# Altium PCB PCB2.PcbDoc
Units mil, origin at the board's own origin, x right, y up, seen from the top; angles counter-clockwise.
Board outline 1605 x 1705 mil, 2 copper layers (Top Layer, Bottom Layer); 5 components, 53 nets, 56 pads, 10 vias.
Unrouted connection lines stored in the file: 2.
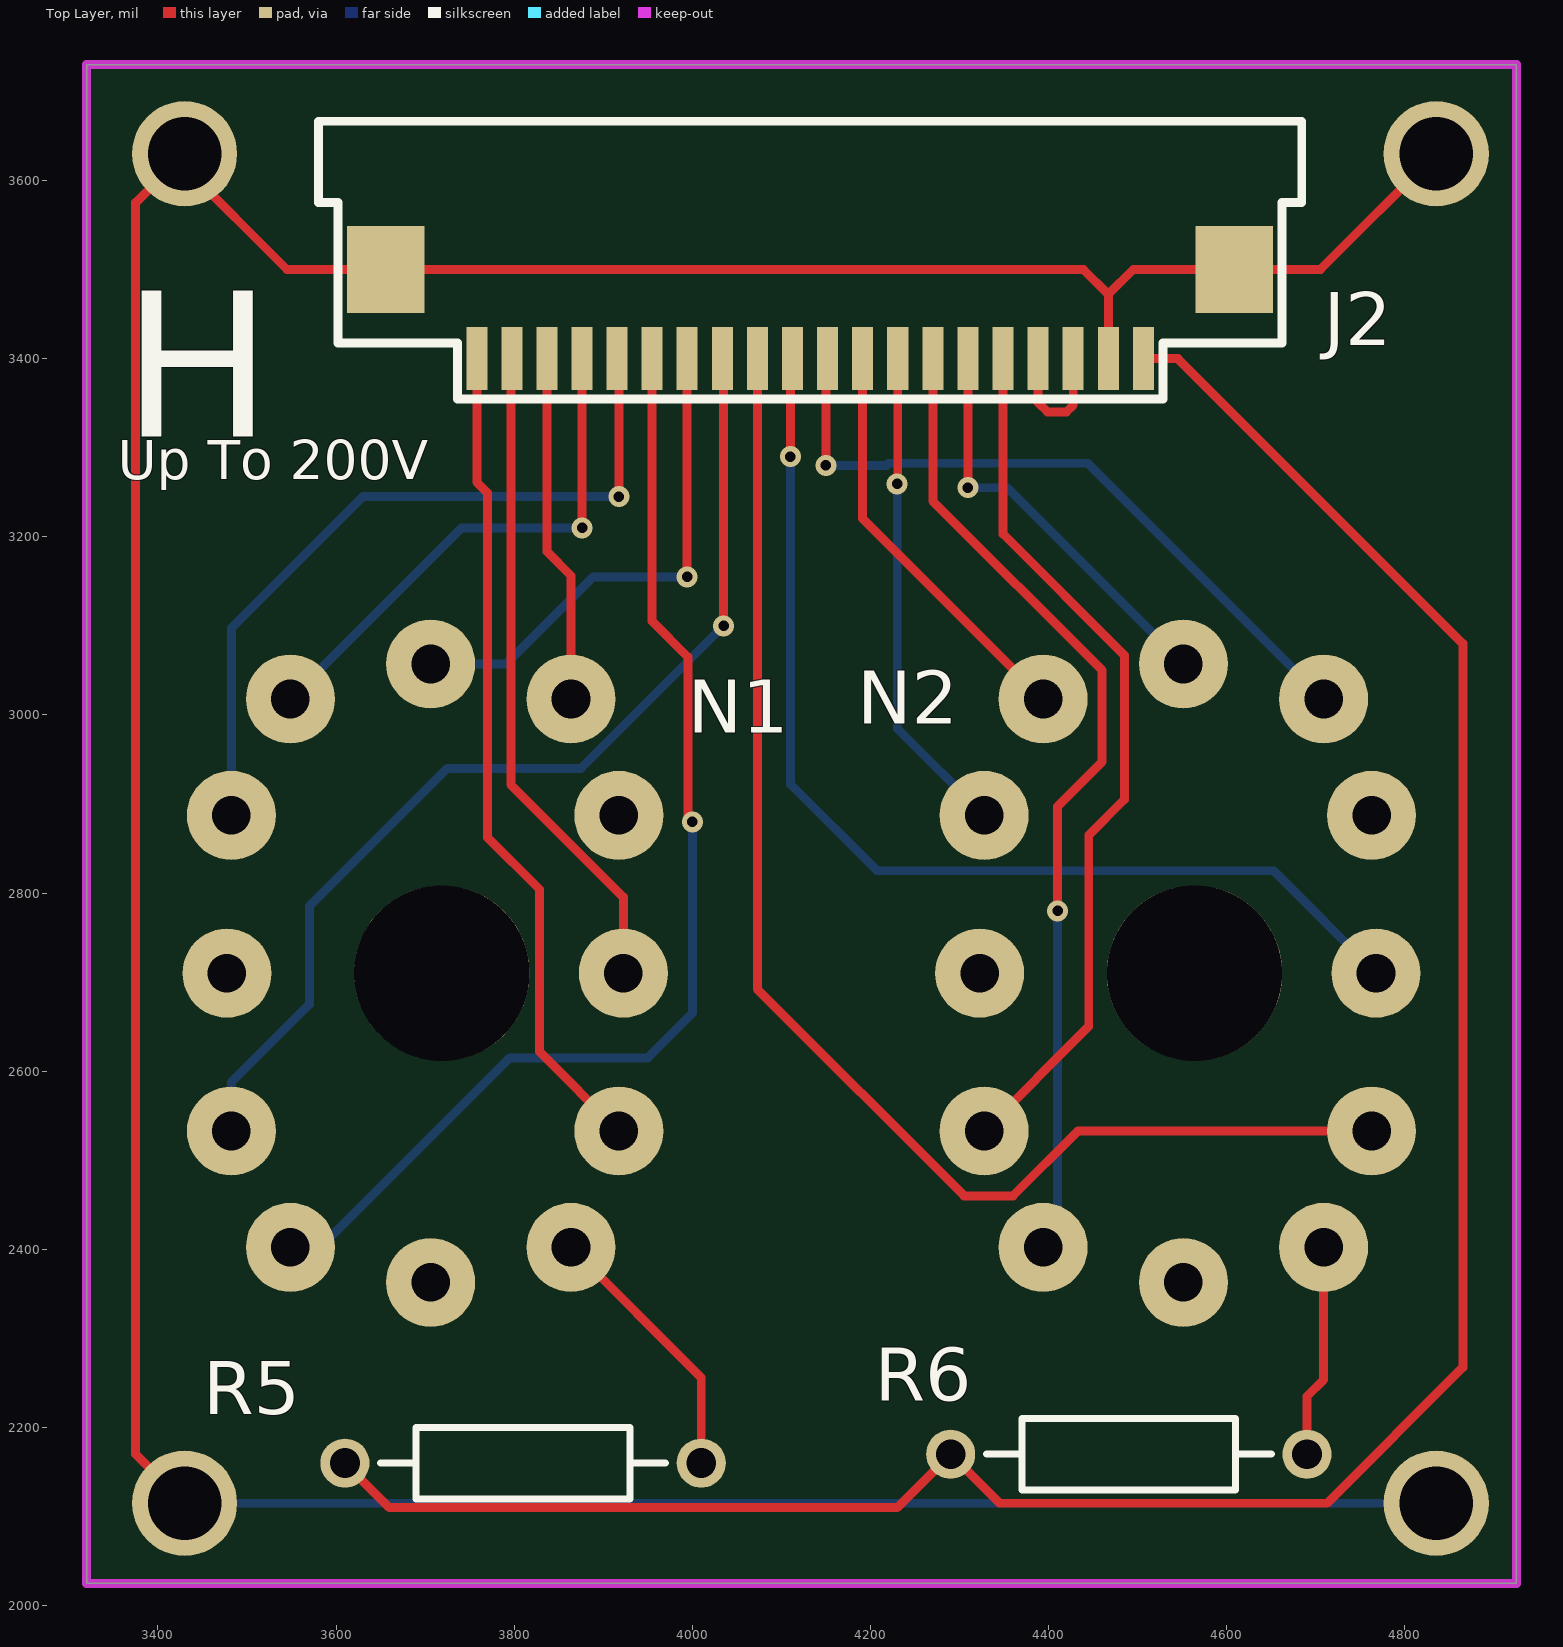
[diagram p0: Top Layer view]
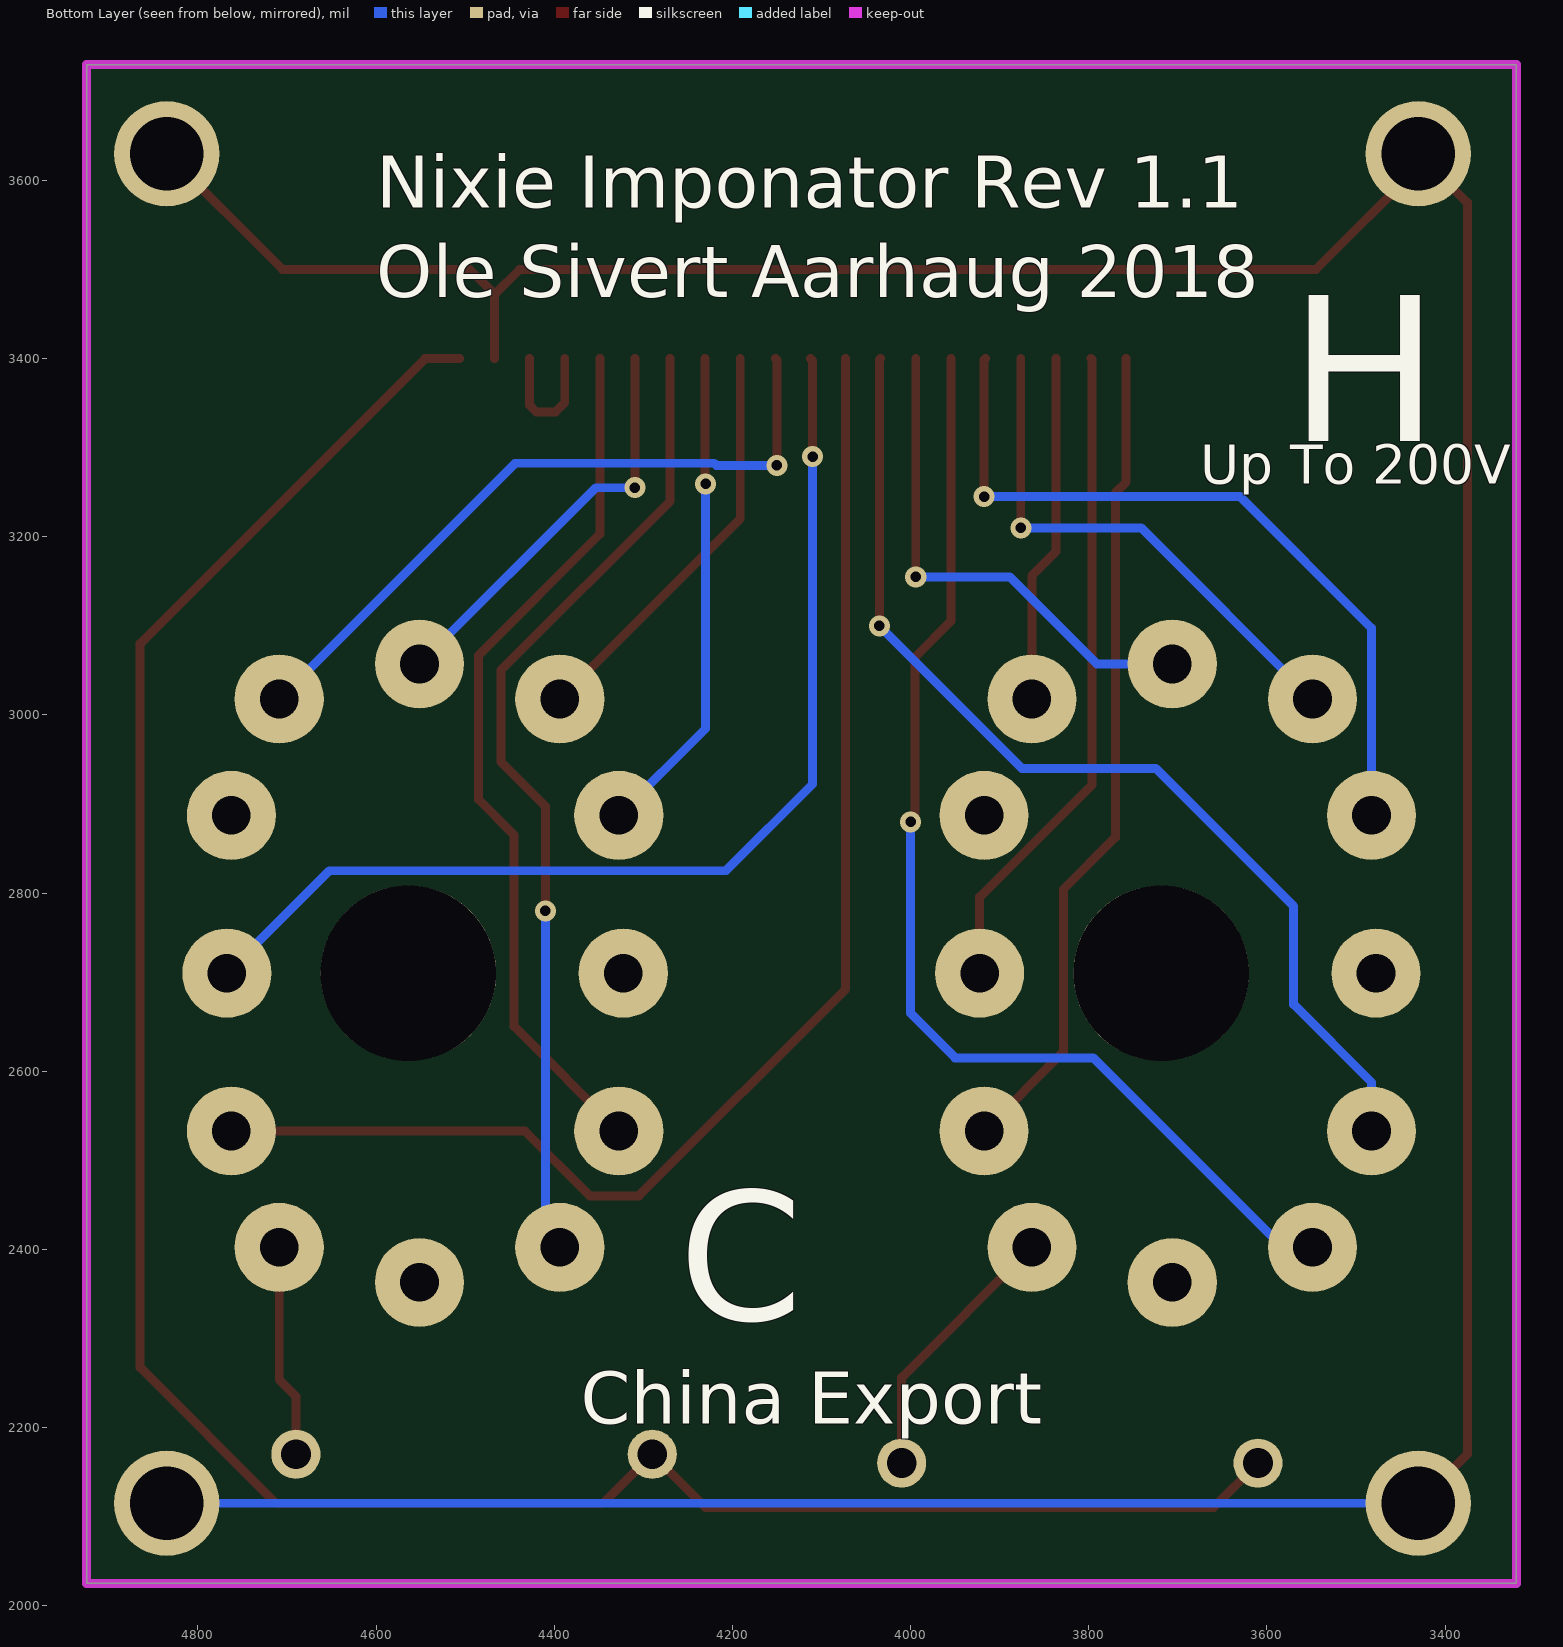
[diagram p1: Bottom Layer view, seen from below]

## Layer stack, top to bottom
Top Solder: solder mask 0.4, Solder Resist, Dk 3.5
Top Layer: signal copper 1.4
Dielectric 1: dielectric 12.6, FR-4, Dk 4.8
Bottom Layer: signal copper 1.4
Bottom Solder: solder mask 0.4, Solder Resist, Dk 3.5

## Board outline
3320,2025 3320,3730 4925,3730 4925,2025

## Design rules (kind name [scope] priority, off if disabled: settings)
Clearance [All] p1: gap=6.3 ignorepadtopadclearanceinfootprint=FALSE except(0: Arc-Text Arc-Hole Track-Text Track-Hole SMDPad-Text SMDPad-Hole THPad-Text THPad-Hole Via-Text Via-Hole Fill-Text Fill-Hole Poly-Text Poly-Hole Region-Text Region-Hole Text-Text Text-Hole)
Height [All] p1: minheight=0 maxheight=7874.02 prefheight=500
HoleSize [All] p1: absolutevalues=TRUE maxlimit=250 minlimit=11.81 maxpercent=80.000 minpercent=20.000
MinimumSolderMaskSliver [All] p1: minsoldermaskwidth=3.94
PlaneClearance [All] p1: clearance=39.37
PlaneConnect [All] p1: planeconnectstyle=Relief reliefexpansion=20 reliefentries=4 reliefconductorwidth=39.37 reliefairgap=10
PolygonConnect PolygonConnect_1 [IsVia] p1: connectstyle=Direct reliefconductorwidth=10 reliefentries=4 polygonreliefangle="90 Angle" airgapwidth=10
PolygonConnect [All] p2: connectstyle=Relief reliefconductorwidth=7.87 reliefentries=4 polygonreliefangle="90 Angle" airgapwidth=7.87
RoutingVias [All] p1: holewidth=11.81 width=23.62 viastyle="Through Hole" minholewidth=11.81 minwidth=23.62 maxholewidth=250 maxwidth=393.7
SilkToSolderMaskClearance [IsPad] p1: minsilkscreentomaskgap=7.01 clearancetoexposedcopper=TRUE
SolderMaskExpansion [All] p1: expansion=4
Width [All] p1: maxlimit=393.7 minlimit=6.3 preferedwidth=15.75
24 further rules are at their usual default settings.

## Classes and differential pairs
net class HV: NetD1_1 NetJ2_1 NixieVCC

## Components (designator, comment, footprint, x,y, rotation, side; value= is the part's Value field where it differs from the comment)
J2 "ZF1-20-01-XX-WT" ZF1-20-01-XX-WT 4151.92,3400 r180 top
N1 "IN-15B" IN-12 3718.78,2710 r0 top
N2 "IN-15B" IN-12 4563.78,2710 r0 top
R5 "Res2" AXIAL-0.4 3810,2160 r0 top value=13K33
R6 "Res2" AXIAL-0.4 4490,2170 r0 top value=13K33

## Footprints (in the part's own frame and the unit in brackets; to place one, negate y for a bottom-side part, rotate by r counter-clockwise, add the part's x,y. Pads: shape width x height; smd on the part's side, far side on the other; paste and mask are expansions set on the pad)
AXIAL-0.4 [mm] "Axial Device, Thru-Hole; 2 Leads; 0.4 in Pin Spacing"
  round 1.4 hole 0.85: 1(-5.08,0) 2(5.08,0)
  silkscreen extent -4.06,-1.02 4.06,1.02
IN-12 [mm]
  round 2.54 hole 1.1: 0(5.047,-4.5) 1(-4.317,-7.818) 2(-6,-4.5) 3(-6.127,0) 4(-6,4.5) 5(-4.317,7.818) 6(-0.318,8.818) 7(3.682,7.818) 8(5.047,4.5) 9(5.174,0) A(3.682,-7.818) LHDP(-0.318,-8.818)
  round 5 hole 5: 1(0,0)
ZF1-20-01-XX-WT [mil]
  rect 23.6x71 smd mask+2: 1(-354.47,0) 2(-315.07,0) 3(-275.67,0) 4(-236.27,0) 5(-196.87,0) 6(-157.48,0) 7(-118.08,0) 8(-78.68,0) 9(-39.28,0) 10(0.12,0) 11(39.5,0) 12(78.9,0) 13(118.3,0) 14(157.7,0) 15(197.1,0) 16(236.24,0) 17(275.64,0) 18(315.04,0) 19(354.44,0) 20(393.84,0)
  rect 87x98 smd mask+2: G1(-456.67,-100) G2(496.04,-100)
  silkscreen extent -532,-266 572,46, body extent -508,-248 555,122, height 258

## Part data
J2: "ZERO INSERTION FORCE 1mm ASSEMBLY, BOTTOM CONTACT."
N1 N2: "IN-15B: medium symbol topview nixie tube", A=A, F=F, H=H, Hz=Hz, Omega=Omega, S=S, v=v, W=W
R5 R6: "Resistor", LatestRevisionDate=17-Jul-2002, LatestRevisionNote="Re-released for DXP Platform.", PackageDescription="Axial Device, Thru-Hole; 2 Leads; 0.4 in Pin Spacing", PackageReference=AXIAL-0.4, Published=8-Jun-2000, Publisher="Altium Limited"

## Free pads (board coordinates)
  round 118.11 hole 82.68: M2(3430,2115) M2(3430,3630) M2(4835,2115) M2(4835,3630)

## Via types
v1: diameter 23.62, hole 11.81, Top Layer to Bottom Layer, 10 vias

## Nets (pads, with @x,y where several pads share a name; then routed paths per layer and width w, separated by ;. In a path a pad name is that pad's centre, name@x,y a point inside that pad or via, vN(x,y) a via of type N, cw(c..) or ccw(c..) an arc to the next point about the centre after c; other vN are vias at no path point)
"5V VCC": 
BatConnInn: 
BatConnOut: 
"Feedback 1.5V": 
GND: J2.2 J2.G1 J2.G2 pad.M2 | length 4582.2
  Top Layer w10: pad.M2@3430,2115 3375,2170 3375,3575 3430,3630 3430,3615 3545,3500 J2.G2 4438.97,3500 4466.98,3471.99 ; J2.2 4466.98,3471.99 ; pad.M2@4835,3630 4705,3500 J2.G1 4495,3500 4466.98,3471.99
  Bottom Layer w10: pad.M2@3430,2115 pad.M2@4835,2115
NetB1_1: 
NetB1_3: 
NetB1_4: 
NetB1_8: 
NetB1_9: 
NetB1_10: 
NetB1_11: 
NetB1_13: 
NetB1_14: 
NetB1_15: 
NetB1_16: 
NetB2_1: 
NetB2_3: 
NetB2_4: 
NetB2_8: 
NetB2_9: 
NetB2_10: 
NetB2_11: 
NetB2_13: 
NetB2_14: 
NetB2_15: 
NetB2_16: 
NetC1_1: 
NetC3_2: 
NetD1_1: 
NetJ2_1: J2.1 R5.1 R6.1 | length 2690.2
  Top Layer w10: R5.1 3660,2110 4230,2110 R6.1 4345,2115 4712.51,2115 4865,2267.49 4865,3080 4545,3400 J2.1
NetJ2_3: J2.3 J2.4 | length 148.7
  Top Layer w10: J2.4 4388.19,3350.62 4398.81,3340 4420,3340 4427.59,3347.59 J2.3
NetJ2_5: J2.5 N2.2 | length 988.8
  Top Layer w10: N2.2 4445,2650.26 4445,2865 4485,2905 4485,3066.87 4348.78,3203.08 J2.5
NetJ2_6: J2.6 N2.6 | length 468.8
  Top Layer w10: v1(4309.4,3255) J2.6
  Bottom Layer w10: v1(4309.4,3255) 4353.44,3255 N2.6
NetJ2_7: J2.7 N2.1 | length 1103.9
  Top Layer w10: J2.7 4270,3240 4460,3050 4460,2947.41 4410,2897.41 v1(4410,2780)
  Bottom Layer w10: N2.1@4393.81,2402.22 4410,2418.41 v1(4410,2780)
NetJ2_8: J2.8 N2.4 | length 553.5
  Top Layer w10: v1(4230,3259.4) 4230.6,3260 J2.8
  Bottom Layer w10: v1(4230,3259.4) 4230,2984.74 N2.4
NetJ2_9: J2.9 N2.5 | length 466.1
  Top Layer w10: J2.9 4191.2,3220.39 N2.5
NetJ2_10: J2.10 N2.7 | length 790.2
  Top Layer w10: v1(4150,3280) 4150,3398.2 J2.10
  Bottom Layer w10: v1(4150,3280) 4217.92,3280 4220.43,3282.51 4444.03,3282.51 N2.7
NetJ2_11: J2.11 N2.9 | length 1224.1
  Top Layer w10: v1(4110,3290) 4110,3397.59 J2.11
  Bottom Layer w10: v1(4110,3290) 4110,2922.41 4207.41,2825 4652.51,2825 N2.9
NetJ2_12: J2.12 N2.0 | length 1523.8
  Top Layer w10: J2.12 4073.01,2691.99 4305,2460 4360,2460 4432.83,2532.83 N2.0
NetJ2_13: J2.13 N1.2 | length 1184.4
  Top Layer w10: J2.13 4035,3398.61 v1(4035,3100)
  Bottom Layer w10: N1.2 3482.57,2587.57 3570,2675 3570,2785 3725,2940 3875,2940 v1(4035,3100)
NetJ2_14: J2.14 N1.6 | length 573.5
  Top Layer w10: v1(3994.22,3155) J2.14
  Bottom Layer w10: N1.6 3790.91,3057.15 3888.76,3155 v1(3994.22,3155)
NetJ2_15: J2.15 N1.1 | length 1313.8
  Top Layer w10: J2.15 3954.82,3105.18 3995,3065 3995,2885 v1(4000,2880)
  Bottom Layer w10: N1.1@3548.8,2402.22 3582.22,2402.22 3795,2615 3950,2615 4000,2665 v1(4000,2880)
NetJ2_16: J2.16 N1.4 | length 862.1
  Top Layer w10: J2.16 3917.51,3398.18 v1(3917.51,3245)
  Bottom Layer w10: N1.4 3482.57,3097.43 3630.13,3245 v1(3917.51,3245)
NetJ2_17: J2.17 N1.5 | length 597.1
  Top Layer w10: v1(3876.28,3210) J2.17
  Bottom Layer w10: N1.5 3741.03,3210 v1(3876.28,3210)
NetJ2_18: J2.18 N1.7 | length 393.4
  Top Layer w10: J2.18 3836.88,3183.12 3863.76,3156.24 N1.7
NetJ2_19: J2.19 N1.9 | length 742.8
  Top Layer w10: J2.19 3796.3,3398.82 3796.3,2921.69 3922.51,2795.48 N1.9
NetJ2_20: J2.20 N1.0 | length 933.2
  Top Layer w10: J2.20 3758.08,3261.32 3770,3249.4 3770,2862.47 3828.51,2803.96 3828.51,2621.83 N1.0
NetN1_A: N1.A R5.2 | length 302.8
  Top Layer w10: N1.A 4010,2255.99 R5.2
NetN2_A: N2.A R6.2 | length 240
  Top Layer w10: R6.2 4690,2235 4708.77,2253.76 N2.A
NetP1_2: 
NetQ1_1: 
NixieVCC: 
pads on no net: N1.3 N1.8 N1.LHDP N2.3 N2.8 N2.LHDP

## Keep-outs
Keep-Out Layer:
  the board outline again, w10

## Silkscreen, mask and mechanical layers (free items; w line width, h text height)
Top Overlay:
  text "H" at 3360,3255 h300
  text "Up To 200V" at 3355,3250 h75
Bottom Overlay:
  text "Nixie Imponator Rev 1.1 / Ole Sivert Aarhaug 2018" at 4600,3450 h100
  text "H" at 3575,3250 h300
  text "Up To 200V" at 3675,3245 h75
  text "C" at 4260,2272.48 h250
  text "China Export" at 4370,2185 h100

## Text inside footprints (layer, text, board x,y; h text height)
J2: Mechanical 1 "J1" at 3954.95,3518.43 h30 r180